# EAGLE board ECG 7 by 7 (EAGLE 9.6.2)
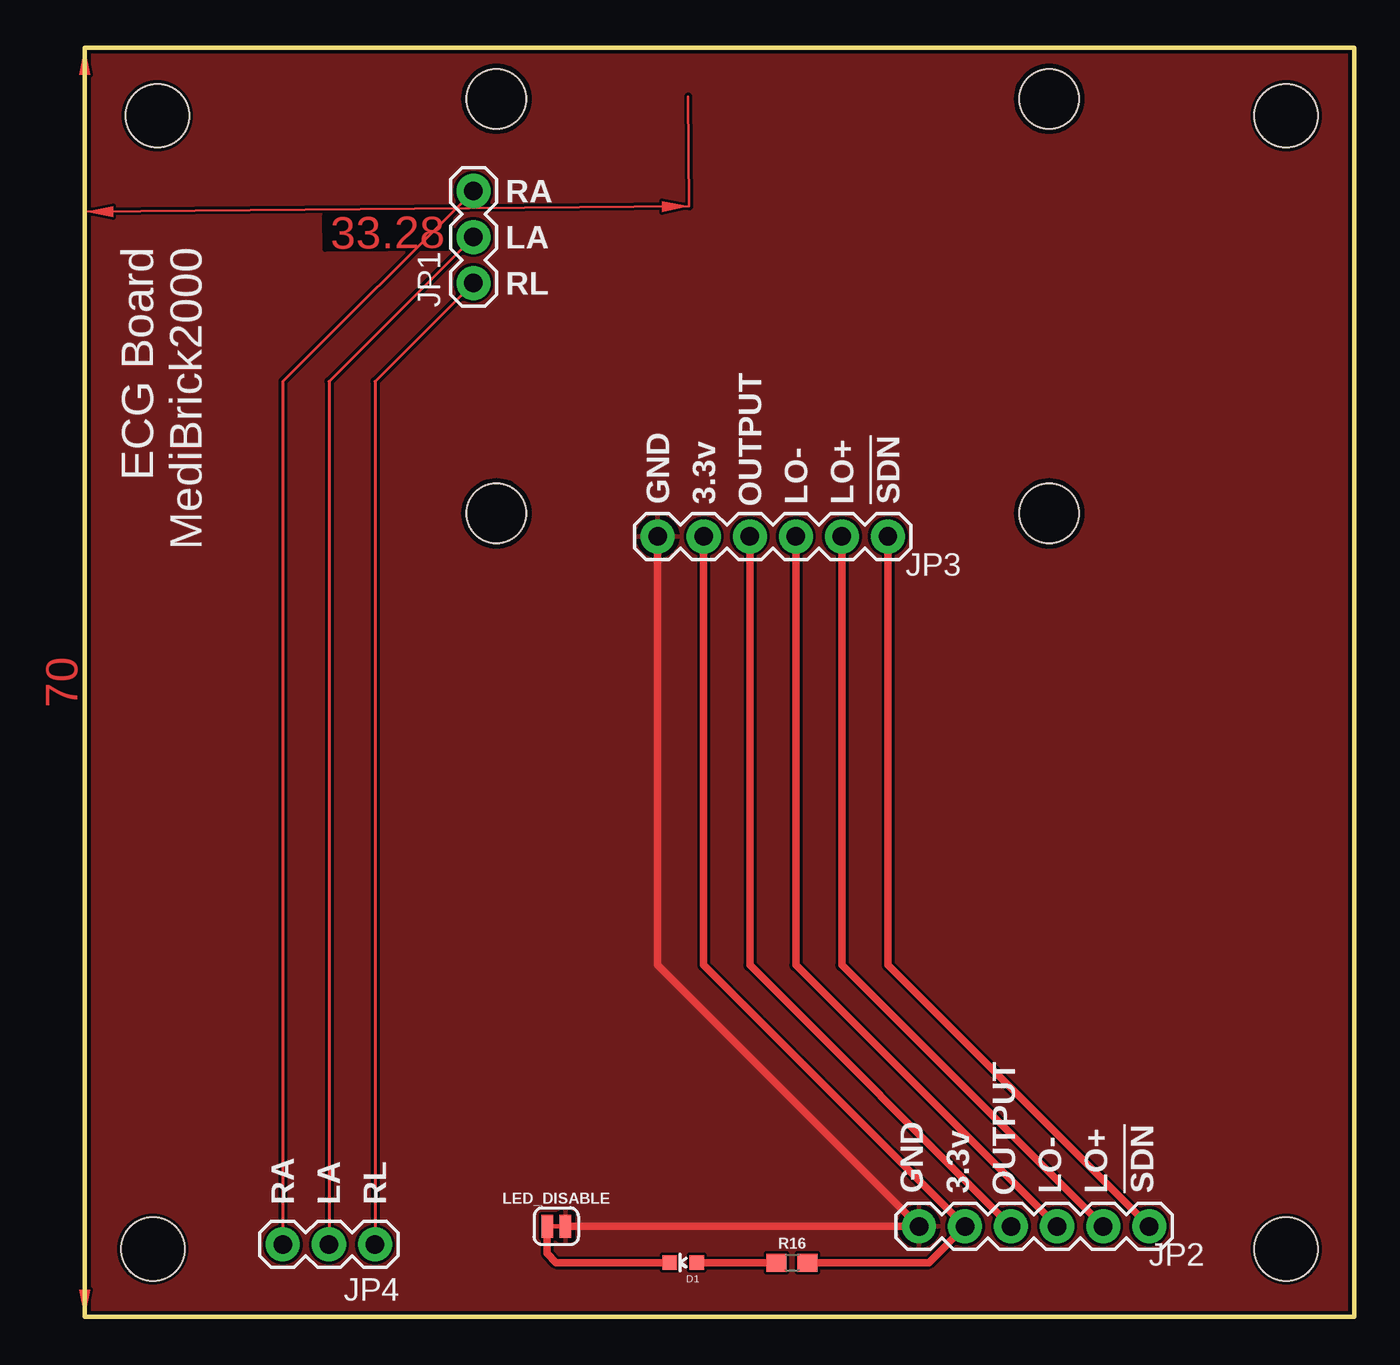
[diagram p0: board, top side]
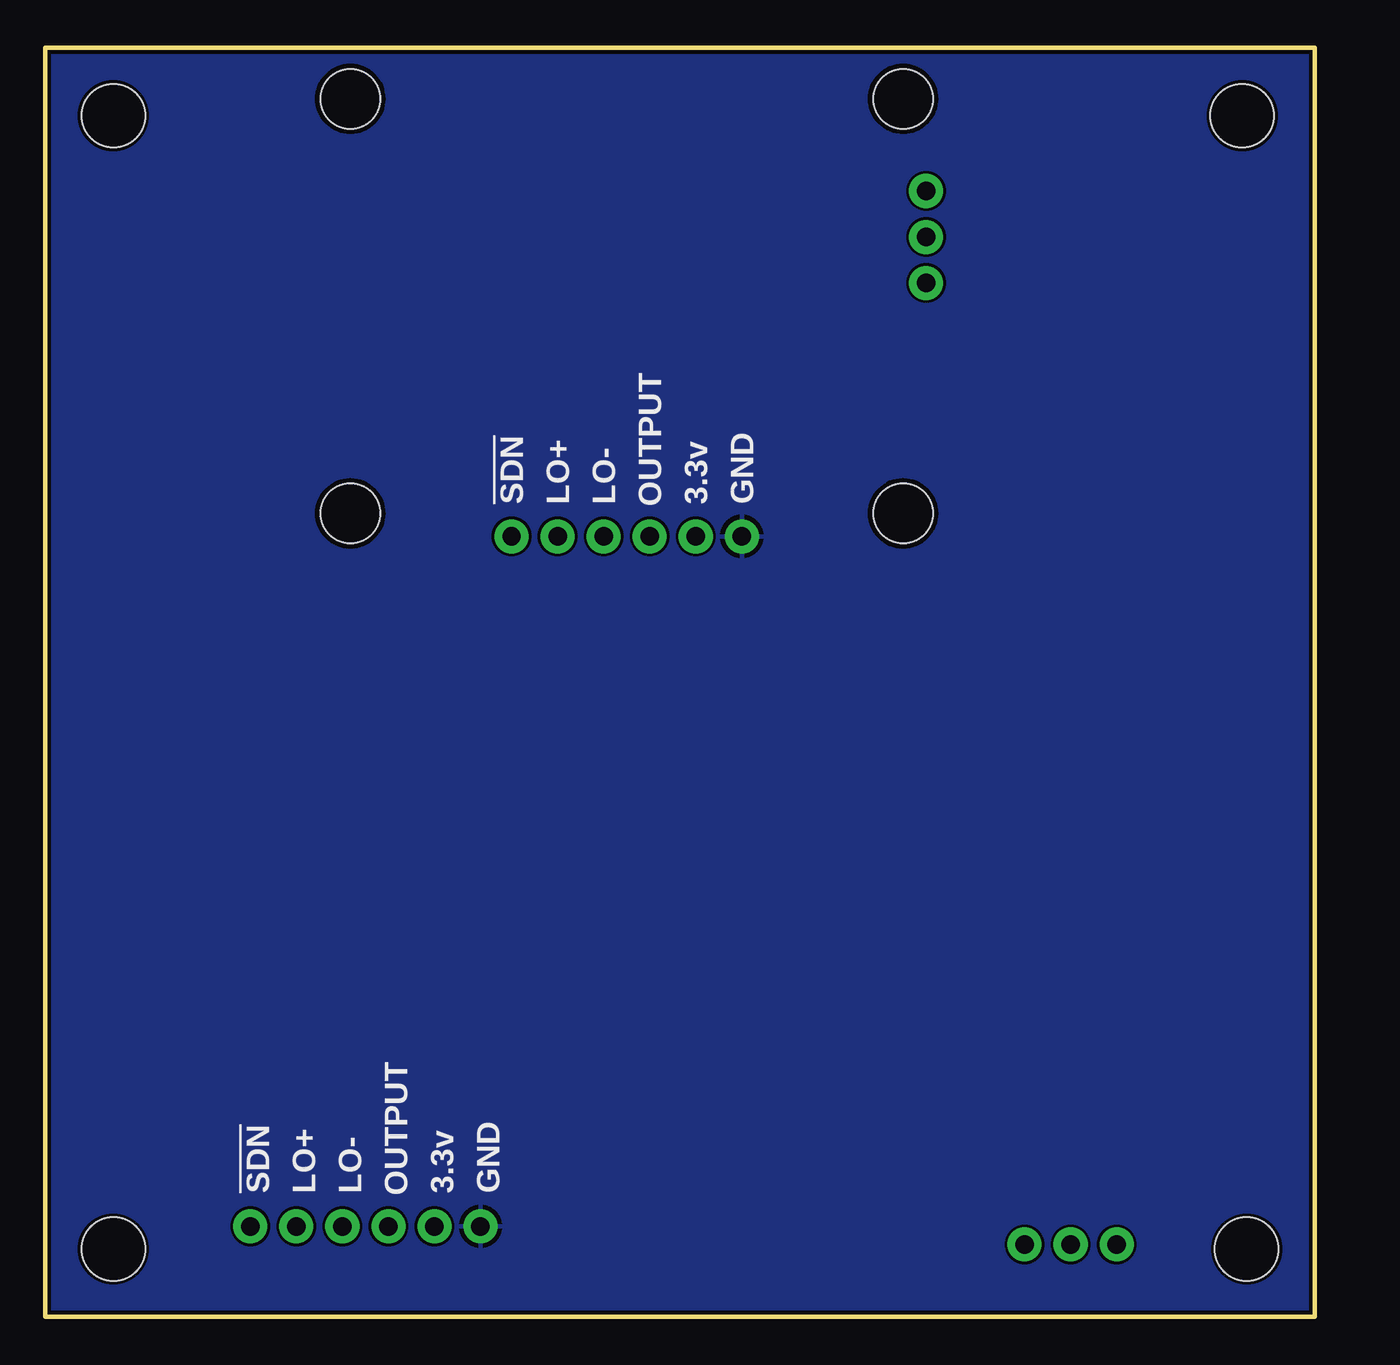
[diagram p1: board, bottom side, seen from below]

Size 70 x 70 mm. Coordinates in mm from the lower left corner, seen from the top.
Outline: 70,0 70,70 0,70 0,0 70,0
Copper layers (1*16): Top 0.035mm / dielectric 1.5mm / Bottom 0.035mm
Design rules "default": minimum track width 7mil, minimum drill 15mil, track to track 6mil, track to pad 8mil, pad to pad 8mil, via to via 8mil, smd to smd 8mil, copper to edge 8mil, drill to drill 8mil, minimum pad ring 12mil, minimum via ring 10mil, stop-mask expansion 4mil, vias tented up to drill 20mil, thermal gap 10mil
Holes 3.5 mm at 4,66.25 66.25,66.25 3.75,3.75 66.25,3.75

## Footprints (pad centres in the part's own frame; a part is rotated, then mirrored left to right if it is on the bottom)
LED-0603 = smd 0.8 x 0.8: A 0,-0.75; C 0,0.75
1X03 = drill 1.016 pad 1.88: 1 0,0; 2 2.54,0; 3 5.08,0
1X06 = drill 1.016 pad 1.88: 1 0,0; 2 2.54,0; 3 5.08,0; 4 7.62,0; 5 10.16,0; 6 12.7,0
SMT-JUMPER_2_NC_TRACE_SILK = smd 0.635 x 1.27: 1 -0.508,0; 2 0.508,0
0603 = smd 1.1 x 1: 1 -0.85,0; 2 0.85,0
STAND-OFF = hole 3.302: 0,0

## Placement (x,y rotation side)
D1  RED  [LED-0603]  33,3 90 top
JP1  [1X03]  21.43,57.02 90 top
JP2  [1X06]  46,5 0 top
JP3  [1X06]  31.59,43.05 0 top
JP4  [1X03]  16,4 180 top
LED_DISABLE  JUMPER-SMT_2_NC_TRACE_SILK  [SMT-JUMPER_2_NC_TRACE_SILK]  26,5 180 top
R16  1k  [0603]  39,3 0 top
STANDOFF1  STAND-OFF  [STAND-OFF]  22.7,67.18 0 top
STANDOFF2  STAND-OFF  [STAND-OFF]  53.18,67.18 0 top
STANDOFF3  STAND-OFF  [STAND-OFF]  53.18,44.32 0 top
STANDOFF4  STAND-OFF  [STAND-OFF]  22.7,44.32 180 top

## Library data of the parts
D1 = SparkFun-LED; PROD_ID: DIO-00819
JP1-JP4 = SparkFun-Connectors
LED_DISABLE = SparkFun-Jumpers
R16 = SparkFun-Resistors; PROD_ID: RES-07856
STANDOFF1-STANDOFF4 = SparkFun-Electromechanical

## Nets
3.3V: JP2.2 JP3.2 R16.2
GND: JP2.1 JP3.1 LED_DISABLE.1
N$1: JP1.1 JP4.1
N$2: JP1.2 JP4.2
N$3: JP1.3 JP4.3
N$4: JP2.6 JP3.6
N$5: JP2.5 JP3.5
N$6: JP2.4 JP3.4
N$7: JP2.3 JP3.3
N$26: D1.A R16.1
N$28: D1.C LED_DISABLE.2

## Tracks (layer width: path | path; a pad name or v marks a point on that pad's centre or on a via)
3.3V
  Top 0.406: JP3.2 34.13,19.41 JP2.2 46.54,3 R16.2
GND
  Top 0.406: JP3.1 31.59,19.41 JP2.1 LED_DISABLE.1
  pour Top: 0,70 70,70 70,0 0,0
  pour Bottom: 0,70 70,70 70,0 0,0
N$1
  Top 0.178: JP1.1 16,51.59 JP4.1
N$2
  Top 0.178: JP1.2 13.46,51.59 JP4.2
N$3
  Top 0.178: JP1.3 10.92,51.59 JP4.3
N$4
  Top 0.406: JP3.6 44.29,19.41 JP2.6
N$5
  Top 0.406: JP3.5 41.75,19.41 JP2.5
N$6
  Top 0.406: JP3.4 39.21,19.41 JP2.4
N$7
  Top 0.406: JP3.3 36.67,19.41 JP2.3
N$26
  Top 0.406: D1.A R16.1
N$28
  Top 0.406: LED_DISABLE.2 25.49,3.51 26,3 D1.C
(copper drawn outside any net)
  shapes: Top area x2

## Text on the board
tPlace: RA | LA | RL | GND | 3.3v | OUTPUT | LO- | LO+ | !SDN | GND | 3.3v | OUTPUT | LO- | LO+ | !SDN | RA | LA | RL
bPlace: GND | 3.3v | OUTPUT | LO- | LO+ | !SDN | GND | 3.3v | OUTPUT | LO- | LO+ | !SDN
tNames: ECG Board / MediBrick2000